# EAGLE board speedclickv1eagleboard (EAGLE 7.6.0)

Size 56.82 x 53.33 mm. Coordinates in mm from the lower left corner, seen from the top.
Outline: 0,0 56.82,0 56.82,53.33 0,53.33 0,0
Copper layers (1*16): Top 0.035mm / dielectric 1.5mm / Bottom 0.035mm
Design rules "default": minimum track width 10mil, minimum drill 24mil, track to track 8mil, track to pad 8mil, pad to pad 8mil, via to via 8mil, smd to smd 8mil, copper to edge 40mil, drill to drill 8mil, minimum pad ring 10mil, minimum via ring 8mil, stop-mask expansion 4mil, vias tented up to drill 0mil, thermal gap 10mil

## Footprints (pad centres in the part's own frame; a part is rotated, then mirrored left to right if it is on the bottom)
PT-10 = drill 1.016 octagon: A -2.54,-5.08; E 2.54,-5.08; S 0,5.08
TL1105 = drill 1 pad 1.676: 1 -2.25,3.25; 2 2.25,3.25; 3 -2.25,-3.25; 4 2.25,-3.25
1X16P-2.54-2.54-11.6-3.0-BLACK-MALE = drill 0.889 pad 1.651 square: 1 0,19.05 | drill 0.889 pad 1.651: 2 0,16.51; 3 0,13.97; 4 0,11.43; 5 0,8.89; 6 0,6.35; 7 0,3.81; 8 0,1.27; 9 0,-1.27; 10 0,-3.81; 11 0,-6.35; 12 0,-8.89; 13 0,-11.43; 14 0,-13.97; 15 0,-16.51; 16 0,-19.05

## Placement (x,y rotation side)
R1  [PT-10]  5,35.48 0 top
S1  [TL1105]  5,10.08 0 top
S2  [TL1105]  5,73.58 0 top  (outside the outline)
S3  [TL1105]  5,48.18 0 top
S4  [TL1105]  5,60.88 0 top  (outside the outline)
U2  [1X16P-2.54-2.54-11.6-3.0-BLACK-MALE]  5,22.78 0 top

## Library data of the parts
R1 S1-S4 U2 = AUTODESK_CIRCUITS_BREADBOARD

## Nets
N$1: U2.4
N$2: U2.9
N$3: U2.10
N$4: U2.11
N$5: U2.12
N$6: U2.13
N$7: U2.7
N$8: U2.8
N$9: R1.S U2.3
N$10: U2.6
N$11: U2.15
N$12: U2.14
N$13: S1.2 S1.4
N$14: S2.2 S2.4
N$15: S3.2 S3.4
N$16: R1.A U2.1 U2.5 U2.16
N$17: S4.2
N$18: S4.4
N$19: R1.E S1.1 S1.3 S2.1 S2.3 S3.1 S3.3 S4.1 S4.3 U2.2

## Tracks (layer width: path | path; a pad name or v marks a point on that pad's centre or on a via)
N$9  (1 unrouted)
N$13  (1 unrouted)
N$14  (1 unrouted)
N$15  (1 unrouted)
N$16  (3 unrouted)
N$19  (9 unrouted)